# Altium PCB MCU.PcbDoc (part 3 of 3)
Units mm, origin at the board's own origin, x right, y up, seen from the top; angles counter-clockwise.
Board outline 91.45 x 80 mm, 4 copper layers (Top Layer, Layer 1, Layer 2, Bottom Layer), stack 1.586 mm thick; 92 components, 37 nets, 225 pads, 313 vias.
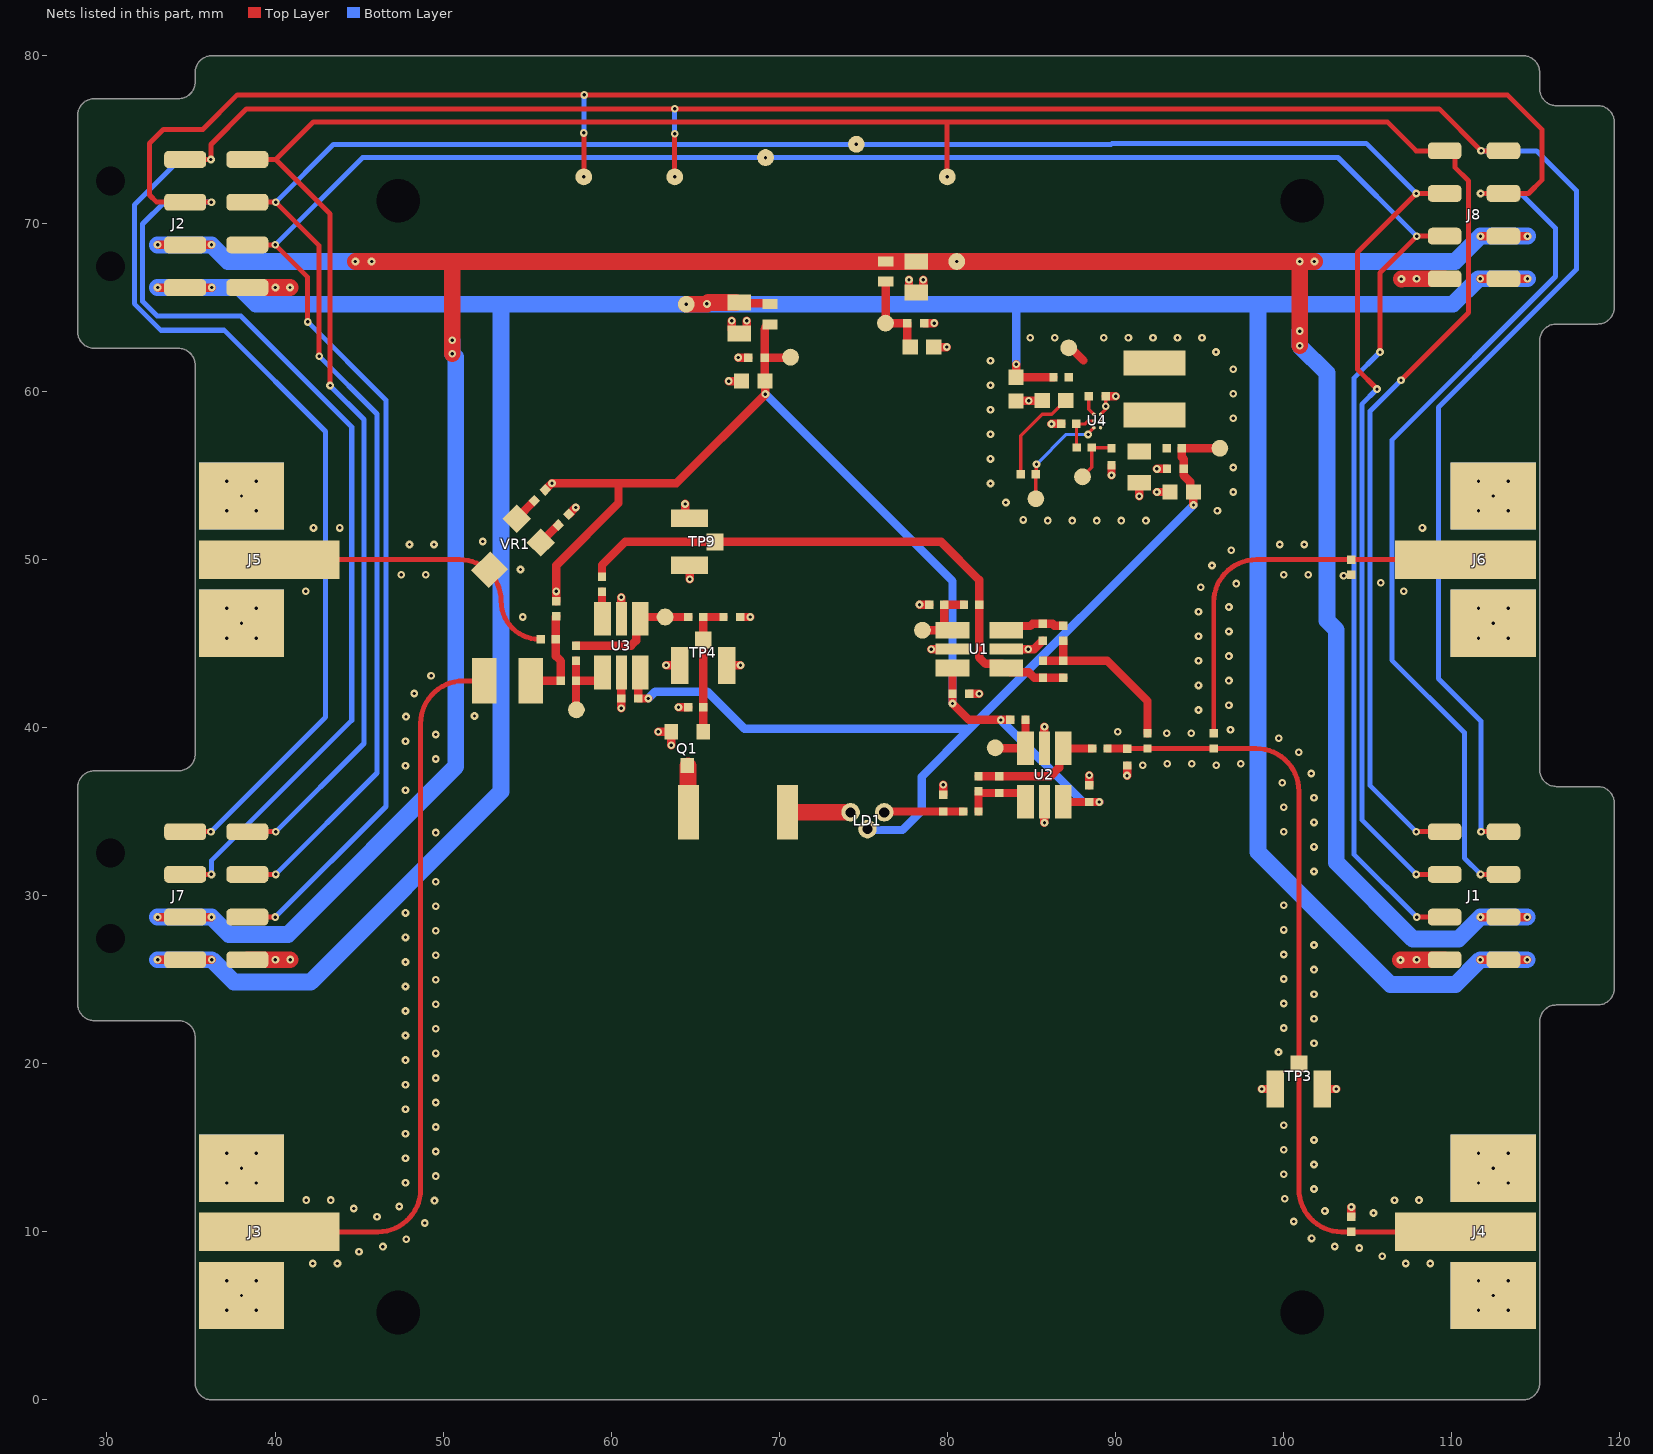
[diagram p4: the nets of this part, all layers, seen from the top]

## Via types
v1: diameter 0.46, hole 0.2, Top Layer to Bottom Layer, tented both sides, 313 vias

## Nets (pads, with @x,y where several pads share a name; then routed paths per layer and width w, separated by ;. In a path a pad name is that pad's centre, name@x,y a point inside that pad or via, vN(x,y) a via of type N, cw(c..) or ccw(c..) an arc to the next point about the centre after c; other vN are vias at no path point)
GND: C1.1 C2.1 C3.1 C4.1 C5.1 C6.1 C10.2 C11.2 C12.2 C13.2 C14.1 C15.2 C16.2 C18.1 C19.1 C20.1 C21.1 C22.1 C23.1 C24.1 J1.5 J2.5 J3.0 J4.0 J5.0 J6.0 J7.5 J8.5 Q1.2 R13.2 R14.2 R15.2 R20.2 R21.2 R24.1 TP3.0 TP4.0 TP9.0 U1.2 U1.5 U2.2 U2.5 U3.2 U3.5 U4.A2 | length 45.5
  Top Layer w0.2: U4.A2@89.125,58.65 89.425,58.95 v1(89.425,59.125) C19.1@89.425,59.725
  Top Layer w0.5: v1@40.89,26.19 v1(40.899,26.199) ; R21.2@57.484,52.695 v1(57.891,53.102) ; v1(60.608,41.161) U3.5@60.608,43.286 ; U3.2@60.608,46.486 v1(60.608,47.761) ; v1(62.804,39.761) Q1.2@63.583,39.761 v1(63.583,38.958) ; v1(63.268,43.711) TP4.0@64.083,43.711 ; v1(64.009,41.211) R13.2@64.584,41.211 ; v1(64.399,53.315) 64.399,52.731 TP9.0@64.674,52.456 ; v1(64.675,48.84) TP9.0@64.675,49.656 ; TP4.0@66.883,43.711 v1(67.699,43.711) ; v1(66.996,60.625) C2.1@67.75,60.625 ; v1(67.171,64.216) 67.171,63.675 67.396,63.45 67.841,63.45 68.066,63.675 68.066,64.211 v1(68.071,64.216) ; v1(67.571,62.025) C3.1@68.15,62.025 ; C15.2@67.683,46.586 v1(68.283,46.586) ; v1(77.725,66.65) 77.725,66.117 77.95,65.892 C4.1@78.154,65.892 78.35,65.892 78.575,66.117 v1(78.575,66.65) ; v1(78.35,47.325) R20.2@78.925,47.325 ; C6.1@78.625,64.075 v1(79.225,64.075) ; v1(79.05,44.675) U1.5@80.312,44.675 ; C5.1@79.2,62.65 v1(79.975,62.65) ; C11.2@79.758,36.011 v1(79.758,36.611) ; C13.2@81.312,42.025 v1(81.912,42.025) ; U1.2@83.512,44.675 v1(84.825,44.675) 85.175,44.675 C14.1@85.675,45.175 ; C18.1@84.1,59.45 v1(84.85,59.45) 85.625,59.45 C20.1@85.65,59.475 ; v1(85.783,34.336) U2.5@85.783,35.586 ; U2.2@85.783,38.786 v1(85.783,40.061) ; v1(86.201,58.07) 86.206,58.075 R24.1@86.776,58.075 ; C16.2@88.45,36.575 v1(88.45,37.175) ; C19.1@89.425,59.725 v1(90.025,59.725) ; v1(89.775,55.025) C21.1@89.775,55.625 ; v1(90.7,37.15) C12.2@90.7,37.75 ; v1(91.425,53.775) C22.1@91.425,54.575 ; v1(92.475,54.025) C24.1@93.25,54.025 ; v1(92.475,55.4) C23.1@93.075,55.4 ; v1(98.713,18.5) TP3.0@99.525,18.5 ; TP3.0@102.325,18.5 v1(103.147,18.5) ; R14.2@104.05,10.9 v1(104.05,11.475)
  Top Layer w1: J7.5@38.349,26.19 v1@40.89,26.19 ; J2.5@38.349,66.19 v1(40.022,66.19) v1(40.89,66.19) ; v1(106.975,26.175) 106.99,26.19 J1.5@109.602,26.19 ; v1(107.025,66.7) 107.035,66.71 J8.5@109.602,66.71
  other v1: 37.116,5.33 38.884,5.33 111.616,5.33 113.384,5.33 38,6.214 112.5,6.214 37.116,7.097 38.884,7.097 111.616,7.097 113.384,7.097 42.251,8.113 43.711,8.113 107.285,8.113 108.745,8.113 105.892,8.552 44.992,8.812 104.516,9.041 46.419,9.121 103.059,9.13 47.814,9.551 101.68,9.61 48.904,10.522 100.621,10.615 46.064,10.903 105.369,11.118 102.474,11.236 44.686,11.385 47.394,11.506 49.491,11.86 41.855,11.887 43.315,11.887 106.613,11.882 108.073,11.887 100.077,11.97 101.828,12.545 37.116,12.903 38.884,12.903 111.616,12.903 113.384,12.903 47.762,12.919 49.569,13.317 100.022,13.429 38,13.786 112.5,13.786 101.828,14.005 47.762,14.379 37.116,14.67 38.884,14.67 111.616,14.67 113.384,14.67 49.569,14.777 100.022,14.889 101.828,15.465 47.762,15.839 49.569,16.237 100.022,16.349 47.762,17.299 49.569,17.697 47.762,18.759 49.569,19.157 47.762,20.219 49.569,20.617 99.709,20.7 101.828,21.224 47.762,21.679 49.569,22.077 100.022,22.126 101.828,22.684 47.762,23.139 49.569,23.537 100.022,23.586 101.828,24.144 47.762,24.599 49.569,24.997 100.022,25.046 101.828,25.604 47.762,26.059 40.022,26.19 107.929,26.19 49.569,26.457 100.022,26.506 101.828,27.064 47.762,27.519 49.569,27.917 100.022,27.966 47.762,28.979 49.569,29.377 100.022,29.426 49.569,30.837 101.828,31.444 101.828,32.904 49.569,33.757 100.022,33.806 101.828,34.364 100.022,35.266 101.828,35.824 47.762,36.279 99.943,36.723 101.654,37.274 47.762,37.739 91.633,37.77 96.008,37.766 93.091,37.858 94.551,37.858 97.465,37.858 49.569,38.137 100.92,38.536 47.762,39.199 99.727,39.378 49.569,39.597 93.057,39.664 94.517,39.664 90.139,39.76 96.852,39.884 47.796,40.659 51.871,40.691 94.955,41.056 96.761,41.341 48.279,42.037 94.955,42.516 96.761,42.801 49.286,43.094 94.955,43.976 96.761,44.261 37.116,45.33 38.884,45.33 111.616,45.33 113.384,45.33 94.955,45.436 96.761,45.721 38,46.214 112.5,46.214 54.733,46.588 94.955,46.896 37.116,47.097 38.884,47.097 111.616,47.097 113.384,47.097 96.761,47.181 41.834,48.113 107.171,48.113 95.083,48.351 97.196,48.575 105.803,48.623 103.584,49.048 47.503,49.097 48.963,49.097 100.019,49.097 101.479,49.097 54.604,49.417 95.754,49.647 96.899,50.553 47.997,50.903 49.457,50.903 99.778,50.903 101.238,50.903 52.366,51.083 42.287,51.887 43.844,51.887 108.275,51.887 85.982,52.324 87.442,52.324 88.902,52.324 90.362,52.324 91.822,52.324 84.523,52.365 37.116,52.903 38.884,52.903 111.616,52.903 113.384,52.903 96.077,52.916 83.491,53.398 38,53.786 112.5,53.786 97.026,54.026 82.574,54.534 37.116,54.67 38.884,54.67 111.616,54.67 113.384,54.67 97.026,55.486 82.574,55.994 82.574,57.454 97.026,58.406 82.574,58.914 97.026,59.866 82.574,60.374 97.026,61.326 82.574,61.834 95.993,62.358 84.941,63.201 86.401,63.201 89.321,63.201 90.781,63.201 92.241,63.201 93.701,63.201 95.161,63.201 107.929,66.71
IDrive: C8.2 C9.2 R9.2 R12.1 TP9.1 U1.1 | length 34.8
  Top Layer w0.5: R9.2@59.458,48.986 59.458,49.683 60.831,51.056 TP9.1@66.175,51.056 79.644,51.056 81.9,48.8 R12.1@81.9,47.325 81.9,44.188 82.287,43.8 83.262,43.8 U1.1@83.512,43.55 83.762,43.3 84.845,43.3 85.17,42.975 85.725,42.975 C8.2@86.9,42.975
LD_BIAS: J5.1 L1.1 VR1.2 | length 20.5
  Top Layer w0.293: J5.1@38,50 J5.1@39.651,50 50.993,50 cw(c50.993,47.543) 53.45,47.543 ccw(c55.732,47.543) 55.732,45.261 L1.1@55.809,45.261
MODULATION: C17.2 J3.1 | length 45.1
  Top Layer w0.293: J3.1@38,10 J3.1@39.651,10 46.125,10 ccw(c46.125,12.54) 48.665,12.54 48.665,40.246 cw(c51.205,40.246) 51.205,42.786 C17.2@52.459,42.786
NetC7_1: C7.1 R3.1 R6.2 U2.1 | length 8
  Top Layer w0.5: R3.1@81.859,37.111 C7.1@83.083,37.111 86.146,37.111 86.658,37.623 86.658,38.536 U2.1@86.909,38.786 86.933,38.761 R6.2@88.633,38.761
NetC7_2: C7.2 R3.2 R5.1 U2.4 | length 4.4
  Top Layer w0.5: R5.1@81.858,35.011 81.858,36.011 R3.2@81.958,36.111 ; R3.2@81.859,36.211 R3.2@81.958,36.111 ; U2.4@84.658,35.586 84.658,35.861 84.408,36.111 C7.2@83.083,36.111 R3.2@81.958,36.111
NetC8_1: C8.1 C9.1 R7.1 R8.2 | length 10.3
  Top Layer w0.5: C9.1@85.7,43.975 C8.1@86.9,43.975 ; R8.2@86.9,45.175 C8.1@86.9,43.975 ; R7.1@91.915,39.661 91.915,41.585 89.525,43.975 C8.1@86.9,43.975
NetC14_2: C14.2 R8.1 U1.3 | length 3.6
  Top Layer w0.5: U1.3@83.512,45.8 83.762,46.05 84.95,46.05 85.075,46.175 C14.2@85.675,46.175 86.275,46.175 86.375,46.075 R8.1@86.9,46.075
NetC15_1: C15.1 Q1.1 R11.1 R13.1 TP4.1 | length 8
  Top Layer w0.5: Q1.1@65.483,39.761 R13.1@65.483,41.211 TP4.1@65.483,45.211 R11.1@65.483,46.586 C15.1@66.683,46.586
NetC17_1: C17.1 L1.2 R16.2 R18.2 | length 5.8
  Top Layer w0.5: C17.1@55.209,42.786 R18.2@57.009,42.786 57.009,43.961 56.709,44.261 L1.2@56.709,45.261 56.709,46.611 R16.2@56.734,46.636
NetC19_2: C19.2 C20.2 FB1.2 L2.2 R22.1 TP10.1 U4.A1 | length 8.2
  Top Layer w0.2: R22.1@84.376,55.075 84.376,57.375 85.655,58.654 86.23,58.654 C20.2@87.05,59.475 ; C19.2@88.425,59.725 88.425,58.95 U4.A1@88.725,58.65
  Top Layer w0.5: TP10.1@87.225,62.6 87.36,62.6 88.11,61.85
NetC21_2: C21.2 C22.2 FB2.1 R23.1 TP18.1 U4.C2 | length 3.2
  Top Layer w0.2: TP18.1@88.05,54.925 88.05,54.956 88.6,55.506 R23.1@88.6,56.675 88.625,56.65 89.75,56.65 C21.2@89.775,56.625
NetJ6_1: J6.1 R15.1 R25.2 | length 25.9
  Top Layer w0.293: R25.2@95.858,39.661 95.858,47.46 cw(c98.398,47.46) 98.398,50 R15.1@104.05,50 J6.1@112.5,50
NetL2_1: L2.1 U4.B2
NetLD1_1: LD1.1 R4.2 | length 3.7
  Top Layer w1: R4.2@70.509,34.965 LD1.1@74.25,34.965
NetQ1_3: Q1.3 R4.1 | length 2.8
  Top Layer w0.5: Q1.3@64.533,37.761 Q1.3@64.571,37.723 ; R4.1@64.571,35.002 R4.1@64.608,34.965
  Top Layer w1: R4.1@64.571,35.002 Q1.3@64.571,37.723
NetR9_1: R9.1 U3.3 | length 1.6
  Top Layer w0.5: U3.3@59.458,46.461 U3.3@59.484,46.486 59.458,46.511 R9.1@59.458,48.086
NetR10_1: R10.1 TP5.1 U2.3 | length 3.5
  Top Layer w0.5: TP5.1@82.85,38.8 82.85,38.786 U2.3@84.658,38.786 R10.1@84.658,40.461
NetR11_2: R11.2 R19.1 TP8.1 U3.1 | length 8
  Top Layer w0.5: R19.1@57.909,44.886 61.191,44.886 61.483,45.178 61.483,46.236 U3.1@61.734,46.486 61.834,46.586 R11.2@64.584,46.586
NetR12_2: R12.2 R20.1 TP6.1 U1.4 | length 4.6
  Top Layer w0.5: TP6.1@78.525,45.8 U1.4@80.075,45.8 ; U1.4@80.312,45.8 U1.4@80.075,45.8 ; R12.2@81,47.325 R20.1@79.825,47.325 79.825,46.05 U1.4@80.075,45.8
NetR17_2: R17.2 VR1.3 | length 1.5
  Top Layer w0.5: VR1.3@54.391,52.43 54.391,52.465 R17.2@55.434,53.508
NetR18_1: R18.1 R19.2 TP7.1 U3.4 | length 4.9
  Top Layer w0.5: R19.2@57.909,43.986 R18.1@57.909,42.786 ; TP7.1@57.933,41.061 57.909,41.086 R18.1@57.909,42.786 ; U3.4@59.484,43.286 59.484,43.036 59.233,42.786 R18.1@57.909,42.786
NetR21_1: R21.1 VR1.1 | length 1.5
  Top Layer w0.5: VR1.1@55.805,51.016 R21.1@56.848,52.059
NetR22_2: R22.2 TP20.1 U4.C1 | length 6.4
  Top Layer w0.2: TP20.1@85.275,53.625 85.275,54.25 ; 85.276,54.25 R22.2@85.276,55.075 85.295,55.094 85.295,55.656 v1(85.314,55.675) ; v1(88.382,57.447) 88.382,57.507 U4.C1@88.725,57.85
  Bottom Layer w0.2: v1(85.314,55.675) 87.086,57.447 v1(88.382,57.447)
NetR23_2: R23.2 R24.2 U4.B1 | length 2.5
  Top Layer w0.2: R23.2@87.7,56.675 87.688,56.687 87.688,58.063 R24.2@87.676,58.075 88.226,58.075 88.4,58.25 U4.B1@88.725,58.25
PD_ANODE: C11.1 LD1.3 R5.2 | length 4.7
  Top Layer w0.5: LD1.3@76.25,34.965 76.296,35.011 C11.1@79.758,35.011 R5.2@80.958,35.011
PD_OUTPUT: C12.1 J4.1 R6.1 R7.2 R14.1 R25.1 TP3.1 | length 49.6
  Top Layer w0.293: C12.1@90.675,38.794 ccw(c90.708,38.794) 90.708,38.761 98.385,38.761 cw(c98.385,36.221) 100.925,36.221 TP3.1@100.925,20 100.925,12.54 ccw(c103.465,12.54) 103.465,10 R14.1@104.05,10 J4.1@110.849,10 J4.1@112.5,10
  Top Layer w0.5: R6.1@89.533,38.761 C12.1@90.708,38.761
SIG1: J1.3 J2.3 J7.3 J8.3 TP17.1 | length 211.7
  Top Layer w0.3: J7.3@34.651,31.27 v1(36.212,31.27) ; v1(36.212,71.27) J2.3@34.651,71.27 32.955,71.27 32.525,71.7 32.525,74.775 33.35,75.6 35.7,75.6 37.755,77.655 v1(58.398,77.655) 113.329,77.655 115.4,75.584 115.4,72.6 114.59,71.79 J8.3@113.1,71.79 v1(111.739,71.79) ; v1(58.375,72.775) v1(58.375,75.392) ; v1(111.739,31.27) J1.3@113.1,31.27 J1.3@113.3,31.27
  Bottom Layer w0.3: v1(36.212,31.27) 36.212,32.087 44.565,40.44 44.565,57.897 37.961,64.5 32.991,64.5 32.118,65.373 32.118,69.968 33.42,71.27 v1(36.212,71.27) ; v1(58.375,75.392) 58.375,77.633 v1(58.398,77.655) ; v1(111.739,31.27) 110.775,32.234 110.775,39.7 106.458,44.017 106.458,57.108 116.2,66.85 116.2,69.725 114.135,71.79 v1(111.739,71.79)
SIG2: J1.4 J2.4 J7.4 J8.4 TP16.1 | length 191.7
  Top Layer w0.3: J7.4@34.651,33.81 v1(36.184,33.81) ; J2.4@34.651,73.81 v1(36.184,73.81) 36.184,74.709 38.3,76.825 109.271,76.825 v1(111.766,74.33) J8.4@113.1,74.33 J8.4@113.3,74.33 ; v1(63.781,72.775) v1(63.781,72.775) 63.782,75.334 v1(63.784,75.335) ; v1(111.766,33.81) J1.4@113.1,33.81 J1.4@113.3,33.81
  Bottom Layer w0.3: v1(36.184,33.81) 43,40.626 43,57.625 36.975,63.65 33.205,63.65 31.625,65.23 31.625,71.1 34.335,73.81 v1(36.184,73.81) ; v1(63.784,75.335) v1(63.784,76.825) ; 110.014,59.839 109.225,59.05 ; v1(111.766,33.81) 111.766,40.384 109.225,42.925 109.225,59.05 ; v1(111.766,74.33) 115.07,74.33 117.45,71.95 117.45,67.275 109.225,59.05
SIG3: J1.6 J2.6 J7.6 J8.6 TP13.1 | length 167.7
  Top Layer w0.3: J7.6@38.349,28.73 v1(40.02,28.73) ; J2.6@38.349,68.73 v1(40.02,68.73) 41.939,66.811 v1(41.939,64.147) ; v1(105.75,62.35) 105.75,67.069 v1(107.931,69.25) J8.6@109.602,69.25 ; v1(107.931,28.73) J1.6@109.602,28.73
  Bottom Layer w0.3: v1(40.02,28.73) 46.6,35.31 46.6,59.486 v1(41.939,64.147) ; v1(40.02,68.73) 45.215,73.925 v1(69.187,73.925) 103.256,73.925 v1(107.931,69.25) ; v1(105.75,62.35) 104.218,60.818 104.218,32.443 v1(107.931,28.73)
SIG4: J1.7 J2.7 J7.7 J8.7 TP14.1 | length 166.5
  Top Layer w0.3: J7.7@38.349,31.27 v1(40.035,31.27) ; J2.7@38.349,71.27 v1(40.035,71.27) 42.625,68.68 v1(42.625,62.109) ; v1(105.577,60.148) 104.4,61.325 104.4,68.274 v1(107.916,71.79) J8.7@109.602,71.79 ; v1(107.916,31.27) J1.7@109.602,31.27
  Bottom Layer w0.3: v1(40.035,31.27) 46.062,37.298 46.062,58.672 v1(42.625,62.109) ; v1(40.035,71.27) 43.465,74.7 74.579,74.7 v1(74.594,74.715) 89.753,74.715 89.813,74.775 104.931,74.775 v1(107.916,71.79) ; v1(105.577,60.148) 104.668,59.24 104.668,34.518 v1(107.916,31.27)
SIG5: J1.8 J2.8 J7.8 J8.8 TP15.1 | length 168.7
  Top Layer w0.3: J7.8@38.349,33.81 v1(40.044,33.81) ; J2.8@38.349,73.81 40.044,73.81 ; v1(43.275,60.361) 43.275,70.579 40.044,73.81 ; TP15.1@80,72.775 v1(79.997,72.775) 79.997,76.05 ; v1(107,60.675) 111.025,64.7 111.025,72.525 110.202,73.348 110.202,73.988 109.859,74.33 J8.8@109.602,74.33 107.907,74.33 106.187,76.05 79.997,76.05 ; v1(107.907,33.81) J1.8@109.602,33.81 ; 40.044,73.81 42.284,76.05 79.997,76.05
  Bottom Layer w0.3: v1(40.044,33.81) 45.289,39.054 45.289,58.336 43.275,60.35 v1(43.275,60.361) ; v1(107,60.675) 105.169,58.844 105.169,36.548 v1(107.907,33.81)
Vd: C10.1 C23.2 C24.2 FB2.2 LD1.2 TP19.1 U3.6 | length 57
  Top Layer w0.5: U3.6@61.734,43.286 61.608,43.161 C10.1@61.608,41.736 v1(62.208,41.736) ; v1(94.65,53.252) C24.2@94.65,54.025 94.45,54.225 94.45,54.637 94.075,55.012 C23.2@94.075,55.4 94.075,55.977 93.95,56.102 FB2.2@93.95,56.625 TP19.1@96.225,56.625
  Bottom Layer w0.5: v1(62.208,41.736) 62.623,42.15 65.719,42.15 67.934,39.935 81.334,39.935 ; LD1.2@75.25,33.965 75.304,33.911 77.336,33.911 78.475,35.05 78.475,37.077 81.334,39.935 ; v1(94.65,53.252) 81.334,39.935
Vs+: C2.2 C3.2 C13.1 C16.1 R1.1 R10.2 R16.1 R17.1 TP1.1 U1.6 U2.6 | length 68.9
  Top Layer w0.5: R17.1@56.07,54.144 v1(56.477,54.551) 60.435,54.551 ; R16.1@56.734,47.536 v1(56.734,48.111) 56.734,49.659 60.435,53.36 60.435,54.551 ; R1.1@69.456,64 ccw(c69.456,63.694) 69.15,63.694 C3.2@69.15,62.025 ; TP1.1@70.675,62.05 cw(c70.65,62.05) 70.65,62.025 C3.2@69.15,62.025 ; U1.6@80.312,43.55 C13.1@80.312,42.025 v1(80.312,41.441) 81.293,40.461 v1(83.183,40.461) R10.2@83.758,40.461 ; U2.6@86.909,35.586 86.919,35.575 C16.1@88.45,35.575 v1(89.048,35.575) ; 60.435,54.551 63.886,54.551 69.179,59.844 69.179,60.596 C2.2@69.15,60.625 C3.2@69.15,62.025
  Bottom Layer w0.5: v1(69.179,59.85) 80.312,48.717 v1(80.312,41.441) ; v1(83.183,40.461) 88.069,35.575 v1(89.048,35.575)
Vs-: C5.2 C6.2 R2.1 TP2.1 | length 5.3
  Top Layer w0.5: R2.1@76.341,66.542 76.333,66.534 76.333,64.083 TP2.1@76.325,64.075 C6.2@77.625,64.075 77.625,62.825 C5.2@77.8,62.65
Vsin+: C1.2 C18.2 FB1.1 J1.1 J2.1 J7.1 J8.1 R1.2 TP11.1 | length 213.3
  Top Layer w0.5: v1(33.01,26.19) J7.1@34.651,26.19 v1(36.235,26.19) ; v1(33.01,66.19) J2.1@34.651,66.19 v1(36.235,66.19) ; C1.2@67.616,65.3 67.666,65.25 69.406,65.25 R1.2@69.456,65.2 ; v1(84.1,61.625) C18.2@84.1,60.85 FB1.1@86.325,60.85 ; v1(111.716,26.19) J1.1@113.1,26.19 v1(114.517,26.19) ; v1(111.716,66.71) J8.1@113.1,66.71 v1(114.53,66.71)
  Top Layer w1: v1(64.471,65.2) 65.683,65.2 65.78,65.297 C1.2@67.416,65.297
  Bottom Layer w0.5: v1(84.1,61.625) 84.1,65.067 84.233,65.2
  Bottom Layer w1: v1(33.01,26.19) v1(36.235,26.19) 37.55,24.875 42.125,24.875 53.45,36.2 53.45,65.2 ; v1(33.01,66.19) v1(36.235,66.19) 37.885,66.19 38.875,65.2 53.45,65.2 ; v1(114.517,26.19) v1(111.716,26.19) 110.251,24.725 106.375,24.725 98.5,32.6 98.5,65.2 ; v1(114.53,66.71) v1(111.716,66.71) 111.598,66.71 110.088,65.2 98.5,65.2 ; 53.45,65.2 v1(64.471,65.2) 65.683,65.2 v1(65.7,65.217) 65.716,65.2 84.233,65.2 98.5,65.2
Vsin-: C4.2 J1.2 J2.2 J7.2 J8.2 R2.2 TP12.1 | length 201
  Top Layer w0.5: v1(33.01,28.73) J7.2@34.651,28.73 v1(36.221,28.73) ; v1(33.01,68.73) J2.2@34.651,68.73 v1(36.221,68.73) ; v1(111.73,28.73) J1.2@113.1,28.73 v1(114.517,28.73) ; v1(111.73,69.25) J8.2@113.1,69.25 v1(114.53,69.25)
  Top Layer w1: v1(44.781,67.742) v1(45.746,67.742) 50.55,67.742 ; v1(50.55,62.256) v1(50.55,63.05) 50.55,67.742 ; v1(100.975,62.726) v1(100.975,63.6) v1(100.975,67.742) ; v1(101.85,67.742) v1(100.975,67.742) ; 50.55,67.742 R2.2@76.341,67.742 C4.2@78.154,67.742 v1(80.565,67.742) v1(100.975,67.742)
  Bottom Layer w1: v1(33.01,28.73) v1(36.221,28.73) 37.251,27.7 40.775,27.7 50.75,37.675 50.75,62.056 v1(50.55,62.256) v1(50.55,63.05) ; v1(33.01,68.73) v1(36.221,68.73) 37.209,67.742 v1(44.781,67.742) v1(45.746,67.742) ; v1(100.975,63.6) v1(100.975,62.726) 102.6,61.101 102.6,46.375 103.15,45.825 103.15,31.975 107.7,27.425 110.425,27.425 v1(111.73,28.73) v1(114.517,28.73) ; v1(100.975,67.742) v1(101.85,67.742) 110.222,67.742 v1(111.73,69.25) v1(114.53,69.25)
pads on no net: J2.0 J7.0 M1.1 M2.1 M3.1 M4.1

## Polygon pours and split planes (outlines as drawn)
GND on Top Layer "GND_L01_P076" (solid, pour order 76): 83.8,63.775 95.1,63.775 97.325,61.55 97.325,53.644 95.681,52 83.975,52 82.225,53.75 82.225,62.2
GND on Top Layer "Top Layer-GND 1" (solid, pour order 70): 417 vertices, not listed, extent 88.299,7.876 116.021,52.124
NetL2_1 on Top Layer "NETL2_1_L01_P064" (solid, pour order 64): 90.475,57.85 90.175,58.15 89.125,58.15 89.125,58.35 89.175,58.35 90.175,59.35 94.2,59.35 94.2,57.875 94.175,57.85
GND on Top Layer "Top Layer-GND" (solid, pour order 74): 333 vertices, not listed, extent 34.479,7.876 57.04,52.124
NetC19_2 on Top Layer "NETC19_2_L01_P067" (solid, pour order 67): 86.6,59.025 87.725,59.025 88.175,59.475 88.675,59.475 88.675,59.975 89.65,60.95 94.157,60.95 94.175,60.968 94.175,62.45 88.325,62.45 86.975,61.1 86.975,60.3 86.6,59.925
NetC21_2 on Top Layer "NETC21_2_L01_P066" (solid, pour order 66): 89.025,57.85 89.025,56.875 89.525,56.375 90.3,56.375 90.725,55.95 92.375,55.95 92.8,56.375 93.3,56.375 93.3,56.875 92.625,57.55 90.298,57.55 89.898,57.95 89.125,57.95
PD_OUTPUT on Top Layer "PD_OUTPUT_L01_P006" (solid, pour order 6): 106.658,11.143 108.275,11.143 108.275,8.857 106.658,8.857 ccw(c104.348,6.683) 104.444,9.854 104.444,10.146 ccw(c104.347,13.317)
NetJ6_1 on Top Layer "NETJ6_1_L01_P000" (solid, pour order 0): 106.658,51.143 108.275,51.143 108.275,48.857 106.658,48.857 ccw(c104.348,46.683) 104.444,49.854 103.679,49.854 103.679,50.143 104.444,50.146 ccw(c104.347,53.317)
MODULATION on Top Layer "MODULATION_L01_P033" (solid, pour order 33): 43.842,8.857 42.225,8.857 42.225,11.143 43.842,11.143 ccw(c46.152,13.317) 46.056,10.146 46.125,10.146 46.125,9.854 46.056,9.854 ccw(c46.153,6.683)
LD_BIAS on Top Layer "LD_BIAS_L01_P036" (solid, pour order 36): 43.842,48.857 42.225,48.857 42.225,51.143 43.842,51.143 ccw(c46.152,53.317) 46.056,50.146 46.821,50.146 46.821,49.857 46.056,49.854 ccw(c46.153,46.683)
GND on Bottom Layer "GND_L04_P075" (solid, pour order 75): 83.025,64.35 96.45,64.35 97.825,62.975 97.825,53.525 95.625,51.325 82.75,51.325 82.1,51.975 82.1,63.425
GND on Layer 2 (split plane): 269 vertices, not listed, extent 28.759,0.503 119.191,79.485
GND on Layer 1 (split plane): 269 vertices, not listed, extent 28.759,0.503 119.191,79.485

## Other copper
Top Layer:
  pour cut-out: 113.842,56.147 cw(c113.842,56.047) 113.842,55.946 112.942,55.946 cw(c112.942,56.047) 112.942,56.147
  pour cut-out: 112.074,56.147 cw(c112.074,56.047) 112.074,55.946 111.174,55.946 cw(c111.174,56.047) 111.174,56.147
  pour cut-out: 109.594,53.376 cw(c109.695,53.376) 109.795,53.376 109.795,52.476 cw(c109.695,52.476) 109.594,52.476
  pour cut-out: 109.594,55.144 cw(c109.695,55.144) 109.795,55.144 109.795,54.244 cw(c109.695,54.244) 109.594,54.244
  pour cut-out: 109.594,46.624 ccw(c109.695,46.624) 109.795,46.624 109.795,47.524 ccw(c109.695,47.524) 109.594,47.524
  pour cut-out: 109.594,44.856 ccw(c109.695,44.856) 109.795,44.856 109.795,45.756 ccw(c109.695,45.756) 109.594,45.756
  pour cut-out: 113.842,43.853 ccw(c113.842,43.953) 113.842,44.054 112.942,44.054 ccw(c112.942,43.953) 112.942,43.853
  pour cut-out: 112.074,43.853 ccw(c112.074,43.953) 112.074,44.054 111.174,44.054 ccw(c111.174,43.953) 111.174,43.853
  pour cut-out: 40.906,46.624 cw(c40.805,46.624) 40.705,46.624 40.705,47.524 cw(c40.805,47.524) 40.906,47.524
  pour cut-out: 40.906,44.856 cw(c40.805,44.856) 40.705,44.856 40.705,45.756 cw(c40.805,45.756) 40.906,45.756
  pour cut-out: 38.426,43.853 cw(c38.426,43.953) 38.426,44.054 39.326,44.054 cw(c39.326,43.953) 39.326,43.853
  pour cut-out: 36.658,43.853 cw(c36.658,43.953) 36.658,44.054 37.558,44.054 cw(c37.558,43.953) 37.558,43.853
  pour cut-out: 36.658,56.147 ccw(c36.658,56.047) 36.658,55.946 37.558,55.946 ccw(c37.558,56.047) 37.558,56.147
  pour cut-out: 38.426,56.147 ccw(c38.426,56.047) 38.426,55.946 39.326,55.946 ccw(c39.326,56.047) 39.326,56.147
  pour cut-out: 40.906,55.144 ccw(c40.805,55.144) 40.705,55.144 40.705,54.244 ccw(c40.805,54.244) 40.906,54.244
  pour cut-out: 40.906,53.376 ccw(c40.805,53.376) 40.705,53.376 40.705,52.476 ccw(c40.805,52.476) 40.906,52.476
  pour cut-out: 40.906,6.624 cw(c40.805,6.624) 40.705,6.624 40.705,7.524 cw(c40.805,7.524) 40.906,7.524
  pour cut-out: 40.906,4.856 cw(c40.805,4.856) 40.705,4.856 40.705,5.756 cw(c40.805,5.756) 40.906,5.756
  pour cut-out: 38.426,3.853 cw(c38.426,3.953) 38.426,4.054 39.326,4.054 cw(c39.326,3.953) 39.326,3.853
  pour cut-out: 36.658,3.853 cw(c36.658,3.953) 36.658,4.054 37.558,4.054 cw(c37.558,3.953) 37.558,3.853
  pour cut-out: 36.658,16.147 ccw(c36.658,16.047) 36.658,15.946 37.558,15.946 ccw(c37.558,16.047) 37.558,16.147
  pour cut-out: 38.426,16.147 ccw(c38.426,16.047) 38.426,15.946 39.326,15.946 ccw(c39.326,16.047) 39.326,16.147
  pour cut-out: 40.906,15.144 ccw(c40.805,15.144) 40.705,15.144 40.705,14.244 ccw(c40.805,14.244) 40.906,14.244
  pour cut-out: 40.906,13.376 ccw(c40.805,13.376) 40.705,13.376 40.705,12.476 ccw(c40.805,12.476) 40.906,12.476
  pour cut-out: 109.594,6.624 ccw(c109.695,6.624) 109.795,6.624 109.795,7.524 ccw(c109.695,7.524) 109.594,7.524
  pour cut-out: 109.594,4.856 ccw(c109.695,4.856) 109.795,4.856 109.795,5.756 ccw(c109.695,5.756) 109.594,5.756
  pour cut-out: 112.074,3.853 ccw(c112.074,3.953) 112.074,4.054 111.174,4.054 ccw(c111.174,3.953) 111.174,3.853
  pour cut-out: 113.842,3.853 ccw(c113.842,3.953) 113.842,4.054 112.942,4.054 ccw(c112.942,3.953) 112.942,3.853
  pour cut-out: 113.842,16.147 cw(c113.842,16.047) 113.842,15.946 112.942,15.946 cw(c112.942,16.047) 112.942,16.147
  pour cut-out: 112.074,16.147 cw(c112.074,16.047) 112.074,15.946 111.174,15.946 cw(c111.174,16.047) 111.174,16.147
  pour cut-out: 109.594,15.144 cw(c109.695,15.144) 109.795,15.144 109.795,14.244 cw(c109.695,14.244) 109.594,14.244
  pour cut-out: 109.594,13.376 cw(c109.695,13.376) 109.795,13.376 109.795,12.476 cw(c109.695,12.476) 109.594,12.476
Bottom Layer:
  pour cut-out: 38.426,11.426 cw(c38.426,11.526) 38.426,11.627 39.326,11.627 cw(c39.326,11.526) 39.326,11.426
  pour cut-out: 36.658,11.426 cw(c36.658,11.526) 36.658,11.627 37.558,11.627 cw(c37.558,11.526) 37.558,11.426
  pour cut-out: 38.426,8.574 ccw(c38.426,8.474) 38.426,8.373 39.326,8.373 ccw(c39.326,8.474) 39.326,8.574
  pour cut-out: 36.658,8.574 ccw(c36.658,8.474) 36.658,8.373 37.558,8.373 ccw(c37.558,8.474) 37.558,8.574
  pour cut-out: 38.426,51.426 cw(c38.426,51.526) 38.426,51.627 39.326,51.627 cw(c39.326,51.526) 39.326,51.426
  pour cut-out: 36.658,51.426 cw(c36.658,51.526) 36.658,51.627 37.558,51.627 cw(c37.558,51.526) 37.558,51.426
  pour cut-out: 38.426,48.574 ccw(c38.426,48.474) 38.426,48.373 39.326,48.373 ccw(c39.326,48.474) 39.326,48.574
  pour cut-out: 36.658,48.574 ccw(c36.658,48.474) 36.658,48.373 37.558,48.373 ccw(c37.558,48.474) 37.558,48.574
  pour cut-out: 112.926,51.426 cw(c112.926,51.526) 112.926,51.627 113.826,51.627 cw(c113.826,51.526) 113.826,51.426
  pour cut-out: 111.158,51.426 cw(c111.158,51.526) 111.158,51.627 112.058,51.627 cw(c112.058,51.526) 112.058,51.426
  pour cut-out: 112.926,48.574 ccw(c112.926,48.474) 112.926,48.373 113.826,48.373 ccw(c113.826,48.474) 113.826,48.574
  pour cut-out: 111.158,48.574 ccw(c111.158,48.474) 111.158,48.373 112.058,48.373 ccw(c112.058,48.474) 112.058,48.574
  pour cut-out: 111.158,8.574 ccw(c111.158,8.474) 111.158,8.373 112.058,8.373 ccw(c112.058,8.474) 112.058,8.574
  pour cut-out: 112.926,8.574 ccw(c112.926,8.474) 112.926,8.373 113.826,8.373 ccw(c113.826,8.474) 113.826,8.574
  pour cut-out: 111.158,11.426 cw(c111.158,11.526) 111.158,11.627 112.058,11.627 cw(c112.058,11.526) 112.058,11.426
  pour cut-out: 112.926,11.426 cw(c112.926,11.526) 112.926,11.627 113.826,11.627 cw(c113.826,11.526) 113.826,11.426
  pour cut-out: 38.426,43.853 cw(c38.426,43.953) 38.426,44.054 39.326,44.054 cw(c39.326,43.953) 39.326,43.853
  pour cut-out: 36.658,43.853 cw(c36.658,43.953) 36.658,44.054 37.558,44.054 cw(c37.558,43.953) 37.558,43.853
  pour cut-out: 40.906,44.856 cw(c40.805,44.856) 40.705,44.856 40.705,45.756 cw(c40.805,45.756) 40.906,45.756
  pour cut-out: 40.906,46.624 cw(c40.805,46.624) 40.705,46.624 40.705,47.524 cw(c40.805,47.524) 40.906,47.524
  pour cut-out: 40.906,55.144 ccw(c40.805,55.144) 40.705,55.144 40.705,54.244 ccw(c40.805,54.244) 40.906,54.244
  pour cut-out: 40.906,53.376 ccw(c40.805,53.376) 40.705,53.376 40.705,52.476 ccw(c40.805,52.476) 40.906,52.476
  pour cut-out: 38.426,56.147 ccw(c38.426,56.047) 38.426,55.946 39.326,55.946 ccw(c39.326,56.047) 39.326,56.147
  pour cut-out: 36.658,56.147 ccw(c36.658,56.047) 36.658,55.946 37.558,55.946 ccw(c37.558,56.047) 37.558,56.147
  pour cut-out: 38.426,3.853 cw(c38.426,3.953) 38.426,4.054 39.326,4.054 cw(c39.326,3.953) 39.326,3.853
  pour cut-out: 36.658,3.853 cw(c36.658,3.953) 36.658,4.054 37.558,4.054 cw(c37.558,3.953) 37.558,3.853
  pour cut-out: 40.906,4.856 cw(c40.805,4.856) 40.705,4.856 40.705,5.756 cw(c40.805,5.756) 40.906,5.756
  pour cut-out: 40.906,6.624 cw(c40.805,6.624) 40.705,6.624 40.705,7.524 cw(c40.805,7.524) 40.906,7.524
  pour cut-out: 40.906,15.144 ccw(c40.805,15.144) 40.705,15.144 40.705,14.244 ccw(c40.805,14.244) 40.906,14.244
  pour cut-out: 40.906,13.376 ccw(c40.805,13.376) 40.705,13.376 40.705,12.476 ccw(c40.805,12.476) 40.906,12.476
  pour cut-out: 38.426,16.147 ccw(c38.426,16.047) 38.426,15.946 39.326,15.946 ccw(c39.326,16.047) 39.326,16.147
  pour cut-out: 36.658,16.147 ccw(c36.658,16.047) 36.658,15.946 37.558,15.946 ccw(c37.558,16.047) 37.558,16.147
  pour cut-out: 112.074,3.853 ccw(c112.074,3.953) 112.074,4.054 111.174,4.054 ccw(c111.174,3.953) 111.174,3.853
  pour cut-out: 113.842,3.853 ccw(c113.842,3.953) 113.842,4.054 112.942,4.054 ccw(c112.942,3.953) 112.942,3.853
  pour cut-out: 109.594,4.856 ccw(c109.695,4.856) 109.795,4.856 109.795,5.756 ccw(c109.695,5.756) 109.594,5.756
  pour cut-out: 109.594,6.624 ccw(c109.695,6.624) 109.795,6.624 109.795,7.524 ccw(c109.695,7.524) 109.594,7.524
  pour cut-out: 109.594,15.144 cw(c109.695,15.144) 109.795,15.144 109.795,14.244 cw(c109.695,14.244) 109.594,14.244
  pour cut-out: 109.594,13.376 cw(c109.695,13.376) 109.795,13.376 109.795,12.476 cw(c109.695,12.476) 109.594,12.476
  pour cut-out: 112.074,16.147 cw(c112.074,16.047) 112.074,15.946 111.174,15.946 cw(c111.174,16.047) 111.174,16.147
  pour cut-out: 113.842,16.147 cw(c113.842,16.047) 113.842,15.946 112.942,15.946 cw(c112.942,16.047) 112.942,16.147
  pour cut-out: 112.074,43.853 ccw(c112.074,43.953) 112.074,44.054 111.174,44.054 ccw(c111.174,43.953) 111.174,43.853
  pour cut-out: 113.842,43.853 ccw(c113.842,43.953) 113.842,44.054 112.942,44.054 ccw(c112.942,43.953) 112.942,43.853
  pour cut-out: 109.594,44.856 ccw(c109.695,44.856) 109.795,44.856 109.795,45.756 ccw(c109.695,45.756) 109.594,45.756
  pour cut-out: 109.594,46.624 ccw(c109.695,46.624) 109.795,46.624 109.795,47.524 ccw(c109.695,47.524) 109.594,47.524
  pour cut-out: 109.594,55.144 cw(c109.695,55.144) 109.795,55.144 109.795,54.244 cw(c109.695,54.244) 109.594,54.244
  pour cut-out: 109.594,53.376 cw(c109.695,53.376) 109.795,53.376 109.795,52.476 cw(c109.695,52.476) 109.594,52.476
  pour cut-out: 112.074,56.147 cw(c112.074,56.047) 112.074,55.946 111.174,55.946 cw(c111.174,56.047) 111.174,56.147
  pour cut-out: 113.842,56.147 cw(c113.842,56.047) 113.842,55.946 112.942,55.946 cw(c112.942,56.047) 112.942,56.147

## Silkscreen, mask and mechanical layers (free items; w line width, h text height)
Top Overlay:
  text "SIG1" at 56.575,76.267 h2
  text "SIG2" at 62.065,76.267 h2
  text "SIG3" at 67.556,76.267 h2
  text "SIG4" at 73.046,76.267 h2
  text "SIG5" at 78.537,76.267 h2
  text "Vs-" at 72.325,63.717 h2
  text "Vs+" at 72.075,61.542 h2
  text "MODULATOR" at 54,56.017 h2
  text "LP" at 88.125,45.225 h2
  text "PD OUT" at 104.868,41.567 h3
  text "LD BIAS" at 36.809,41.462 h3
  text "TRANSIMPEDANCE" at 77.925,29.542 h2
  text "LASER DIODE DRIVER" at 64.025,4.972 h2
  text "Kevin Heyer / V0.0.X" at 64.1,3.125 h1
  text "PD OUT" at 104.875,1.7 h3
  text "LD MOD" at 36.429,1.462 h3
Bottom 3D Body Top/3D Body Bot:
  lines w0.2: 0,0 0,74.463 100,74.463 100,0 0,0
Board:
  lines w0.2: 114.231,79.994 36.25,79.994 ccw(c36.25,78.994) 35.25,78.994 35.25,78.43 cw(c34.25,78.43) 34.25,77.43 29.25,77.43 ccw(c29.25,76.43) 28.25,76.43 28.25,70 28.25,63.57 ccw(c29.25,63.57) 29.25,62.57 34.25,62.57 cw(c34.25,61.57) 35.25,61.57 35.25,38.43 cw(c34.25,38.43) 34.25,37.43 29.25,37.43 ccw(c29.25,36.43) 28.25,36.43 28.25,30 28.25,23.57 ccw(c29.25,23.57) 29.25,22.57 34.25,22.57 cw(c34.25,21.57) 35.25,21.57 35.25,0.994 ccw(c36.25,0.994) 36.25,-0.006 114.25,-0.006 ccw(c114.25,0.994) 115.25,0.994 115.25,22.5 cw(c116.25,22.5) 116.25,23.5 118.701,23.5 ccw(c118.701,24.5) 119.701,24.5 119.701,30 119.701,35.5 ccw(c118.701,35.5) 118.701,36.5 116.25,36.5 cw(c116.25,37.5) 115.25,37.5 115.25,63.02 cw(c116.25,63.02) 116.25,64.02 118.701,64.02 ccw(c118.701,65.02) 119.701,65.02 119.701,70.52 119.701,76.02 ccw(c118.701,76.02) 118.701,77.02 116.25,77.02 cw(c116.25,78.02) 115.25,78.02 115.25,78.994 ccw(c114.25,78.994) 114.25,79.994 ; 115.25,77.95 115.25,77.959